# Altium PCB FU-AM-FU6861-B-025-HW-V1.0-20210601.pcbdoc (part 2 of 2)
Units mil, origin at the board's own origin, x right, y up, seen from the top; angles counter-clockwise.
Board outline 6000 x 4000 mil, 2 copper layers (Top Layer, Bottom Layer); 124 components, 51 nets, 325 pads, 278 vias.
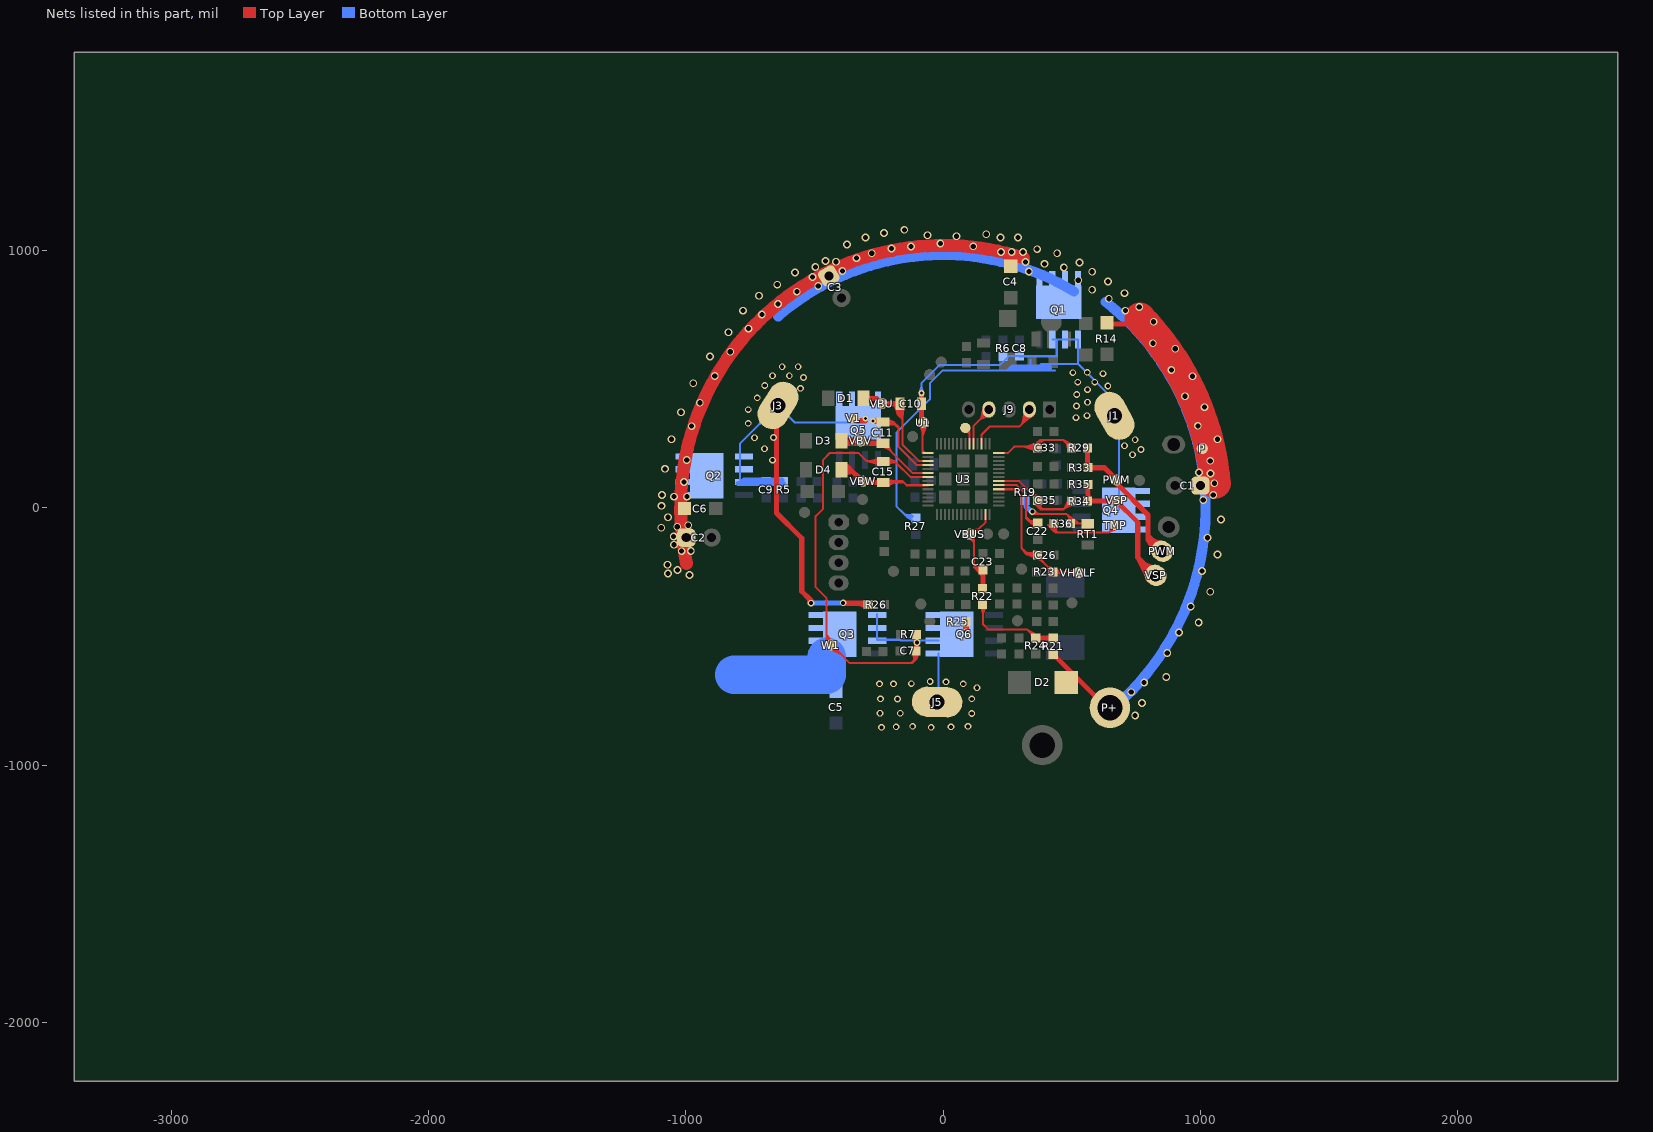
[diagram p2: the nets of this part, all layers, seen from the top]

## Via types
v1: diameter 26, hole 16, Top Layer to Bottom Layer, tented both sides, 137 vias
v2: diameter 30, hole 20, Top Layer to Bottom Layer, tented both sides, 131 vias
v3: diameter 23.62, hole 11.81, Top Layer to Bottom Layer, tented both sides, 7 vias
v4: diameter 27.56, hole 15.75, Top Layer to Bottom Layer, tented both sides, 3 vias

## Nets (pads, with @x,y where several pads share a name; then routed paths per layer and width w, separated by ;. In a path a pad name is that pad's centre, name@x,y a point inside that pad or via, vN(x,y) a via of type N, cw(c..) or ccw(c..) an arc to the next point about the centre after c; other vN are vias at no path point) (continued)
NetJ8_1: PWM.1 R29.1 R33.2 | length 804
  Top Layer w20: R33.2@561.05,158.04 R29.1@561.05,233.29 ; R33.2@562.56,156.53 626.75,156.53 PWM.1@674.22,109.06 674.22,94.78 796,-27 796,-109 ; PWM.1@840.09,-192.3 796,-124 ; PWM.1@849,-139 814,-127 796,-109 ; PWM.1@874.34,-188.09 860.09,-188.09 PWM.1@817,-145 ; PWM.1@880,-162 PWM.1@817,-145 ; 796,-124 PWM.1@817,-145 ; 796,-124 796,-109
NetJ10_1: R34.1 R35.2 VSP.1 | length 940.7
  Top Layer w8: VSP.1@843.79,-279.92 VSP.1@849.48,-285.6
  Top Layer w20: R34.1@561.05,26.32 673.68,26.32 756,-56 756,-192.13 ; R34.1@562.56,27.83 R35.2@562.56,91.77 ; VSP.1@801,-249 801,-277 840.87,-277 756,-192.13 ; VSP.1@802,-281 756,-192.13 ; VSP.1@805.94,-242.06 782.94,-219.06 ; VSP.1@805.94,-232.06 VSP.1@853,-245 ; VSP.1@810.94,-232.06 VSP.1@848.79,-269.92 ; VSP.1@822,-236 782.94,-219.06 ; 756,-192.13 782.94,-219.06
NetR19_2: R19.2 R36.1 RT1.1 | length 387.5
  Top Layer w8: v1@346,-22 361,-23 ; v1(346.42,-14.42) 355,-23 361,-23 ; v1@353,-9 363,-19 374,-23 ; R36.1@490,-50 488.5,-33.5 ; 521,-55 478,-23 ; RT1.1@547,-61 516,-61 488.5,-33.5 ; 361,-23 374,-23 ; 374,-23 478,-23 ; 478,-23 488.5,-33.5
  Bottom Layer w20: R19.2@322.34,35.9 322.34,5.66 v1@341,-13
NetR21_2: R21.2 R22.1 R24.1 | length 540.5
  Top Layer w8: R22.1@147,-382 153.99,-411 ; R22.1@153.99,-374.54 153.99,-402 ; R22.1@161,-382 153.99,-402 ; R22.1@166,-381 153.99,-411 ; R24.1@349,-514 338.78,-479.88 ; R24.1@359.69,-505.9 358.9,-505.9 325,-472 ; R24.1@367,-496 338.78,-479.88 ; R21.2@427.2,-505.9 R21.2@427.93,-505.9 ; 153.99,-411 153.99,-450.99 175,-472 325,-472 ; 153.99,-411 153.99,-402 ; 325,-472 338.78,-479.88
  Top Layer w20: R24.1@359.69,-505.17 R21.2@427.2,-505.17
NSS: J9.2 U3.45 | length 429.4
  Top Layer w8: U3.45@148.87,249.8 148.87,284.87 180,316 295,316 306.5,327.5 ; 308,331 J9.2@316,372 ; J9.2@320,370 312,333 ; J9.2@329,366 316.5,337.5 ; J9.2@346.77,367.77 316.5,337.5 ; J9.2@347,359 306.5,327.5 ; 306.5,327.5 312,333 ; 312,333 316.5,337.5
OVP: C23.1 R22.2 U3.27 VBUS.1 | length 554.3
  Top Layer w8: VBUS.1@104,-118 120,-136 ; VBUS.1@105,-87 138.31,-81.31 ; VBUS.1@108,-93 131.81,-87.81 ; VBUS.1@109,-116 120,-132 ; C23.1@141,-245 123,-227 120,-227 ; C23.1@142,-229 130.59,-229.57 ; C23.1@148,-242 130.59,-229.57 ; 151,-265 120,-231 ; C23.1@154.48,-240.95 129.95,-240.95 120,-231 ; U3.27@164.61,-25.79 164.61,-55 138.31,-81.31 ; 120,-231 120,-227 ; 120,-227 120,-222 ; 120,-222 120,-136 ; 120,-222 130.59,-229.57 ; 120,-136 120,-132 ; 120,-132 120,-99.61 131.81,-87.81 ; 131.81,-87.81 138.31,-81.31
  Top Layer w20: R22.2@154.48,-311.06 C23.1@154.48,-240.95
P: C1.1 C2.1 C3.1 C4.2 C5.2 C6.2 D2.1 P+.1 P.1 Q1.5 Q1.6 Q1.7 Q1.8 Q2.5 Q2.6 Q2.7 Q2.8 Q3.5 Q3.6 Q3.7 Q3.8 R14.1 R21.1 | length 6635.7
  Top Layer w20: R21.1@427.93,-568.89 P+.1@635.93,-776.89 ; R14.1@640.29,715.72 712.28,715.72
  Top Layer w50: -997.82,-215.37 cw(c0,0) 312.77,971.7
  Top Layer w120: 764.32,737.86 cw(c0,0) v2@1058.04,95.77
  Bottom Layer w40: -641.56,745.34 cw(c0,0) Q1.5@508.43,841.8 ; 631.63,801.01 cw(c0,0) P+.1@703.41,-738.77
  Bottom Layer w150: -813.14,-648.65 -453,-648.65 Q3.5@-453,-578
  other v2: 746,-807 773,-758 731,-716 781,-679 867,-657 871,-564 917,-484 993,-445 962,-383 1038,-326 -986,-261 -1070,-255 1006,-245 -1033,-241 -1072,-221 1066,-181 -1017,-168 -981,-167 -1047,-143 1027,-116 -1048,-111 -1096,-77 -1034,-73 -991,-67 1080,-45 -1070,-36 -1095,8 1011,31 -1047,44 -996,44 -1093,50 1050,50 1054,96 -1008,101 1039,134 994,138 -1082,152 1038,183 -997,186 -1056,267 1066,267 -978,318 990,319 -1019,372 1016,392 -946,409 940,434 -972,485 969,512 -888,513 887,536 -907,589 -828,607 902,619 815,640 -835,683 -757,697 818,724 -705,752 -778,767 708,767 762,781 -642,793 644,813 -716,825 705,835 -569,841 579,848 -486,863 -645,868 641,880 525,885 -508,898 -576,915 579,918 333,919 -392,921 469,935 -497,937 394,949 530,954 320,956 -417,957 -458,960 -337,971 -278,990 443,990 225,995 266,995 310,995 365,1006 -201,1009 -125,1016 117,1017 -374,1024 -11,1028 -302,1051 223,1051 291,1051 52,1056 -61,1060 167,1064 -230,1069 -151,1081
P07: pad.0@86,311 U3.48 | length 77.8
  Top Layer w8: pad.0@86,297 102,290 ; pad.0@100,310 102,290 ; U3.48@101.62,249.8 102,290
PWM: C33.2 R29.2 U3.42 | length 591.5
  Top Layer w8: U3.42@215.8,214.36 252.36,214.36 276,238 277,238 277.08,238.08 312,238.08 ; 325,238.08 C33.2@368.04,238.08 ; 345,242 378,264 ; 347.54,233.54 378,264 ; C33.2@350,232 323,238.08 ; C33.2@353,226 312,238.08 ; C33.2@353,249 323,238.08 ; C33.2@365,245 382.75,257.97 ; C33.2@377,242 382.75,257.97 ; R29.2@485,228 479.17,252.17 ; R29.2@498.05,233.29 479.17,252.17 ; R29.2@503,247 467.34,264 ; 312,238.08 323,238.08 ; 378,264 391,264 ; 382.75,257.97 391,264 ; 391,264 467.34,264 ; 467.34,264 479.17,252.17
SCLK: J9.4 U3.47 | length 265.9
  Top Layer w8: U3.47@117.37,249.8 117.37,317.37 146.5,346.5 ; J9.4@155,382 146.5,346.5 ; J9.4@160,373 146.5,346.5 ; J9.4@175,357 146.5,346.5 ; J9.4@189.29,389.29 146.5,346.5
TMP: C22.2 R36.2 TMP.1 U3.34 | length 786.4
  Top Layer w8: U3.34@215.8,88.38 286.62,88.38 322,53 322,-8 322,-35 ; 338,-50 322,-35 ; C22.2@353,-68 322,-40 ; C22.2@357,-54 336.58,-50.4 ; C22.2@357,-49 336.58,-50.4 ; C22.2@366,-60 342,-60 331.5,-49.5 ; 408,-67 430.75,-89.75 ; R36.2@426,-75 437.77,-86.24 ; R36.2@430.75,-61.03 430.75,-89.75 ; R36.2@440,-73 437.77,-86.24 ; TMP.1@655,-66 650,-88 ; TMP.1@669,-69 650,-88 ; TMP.1@670,-83 642,-96 ; 322,-40 331.5,-49.5 ; 322,-40 322,-35 ; 331.5,-49.5 336.58,-50.4 ; 430.75,-89.75 437,-96 448,-96 ; 437.77,-86.24 448,-96 ; 448,-96 642,-96 ; 642,-96 650,-88
U: C8.1 C10.1 J1.1 Q1.1 Q1.2 Q1.3 Q4.5 Q4.6 Q4.7 Q4.8 R6.1 R27.1 U1.1 U3.1 | length 3766.5
  Top Layer w8: U1.1@-91,324 -80.37,296 ; U3.1@-80.37,215.1 U3.1@-79.63,214.36 ; U1.1@-80.37,333.63 -80.37,296 ; U3.1@-80,216 -80.37,222 ; U1.1@-73,317 -80.37,291 ; U1.1@-64,320 -80.37,279 ; U3.1@-59.8,214.36 -72.73,214.36 -80.37,222 ; -80.37,222 -80.37,279 ; -80.37,279 -80.37,291 ; -80.37,291 -80.37,296
  Top Layer w20: U1.1@-85,333.63 v3(-85,446)
  Bottom Layer w8: R27.1@-124,-27 -135,-28 -151.5,-23.5 ; R27.1@-120.62,-37 -138,-37 ; R27.1@-120,-48 -138,-37 ; R27.1@-118,-32 -145,-30 ; v3@-92,448 -85,473 ; v3(-85,446) -85,473 ; v3@-79,449 -85,473 ; C8.1@297.17,590.08 254.89,590.08 219.8,555 -15,555 -85,485 -85,473 ; 339.5,555.5 339.5,575.5 ; 354.5,541.5 254.5,541.5 ; 370.5,547.5 260.5,547.5 ; 375,553 266,553 260.5,547.5 ; 416,551 372,551 ; 418.5,548.5 369.5,548.5 ; 419.5,542.5 363.5,542.5 ; Q1.3@423.99,654.48 Q1.2@473.99,654.48 Q1.1@523.99,654.48 523.99,560.01 665.35,418.65 J1.1@665.35,358.27 ; 435,535 356,535 ; 522.97,559 380,559 377.5,556.5 372,551 ; Q4.5@682.63,-8.55 J1.1@682.63,340.99 ; -151.5,-23.5 -182,7 -182,292 -52,422 -52,485 -2,535 248,535 ; -151.5,-23.5 -145,-30 ; -145,-30 -138,-37 ; 248,535 356,535 ; 248,535 254.5,541.5 ; 254.5,541.5 260.5,547.5 ; 356,535 363.5,542.5 ; 363.5,542.5 369.5,548.5 ; 369.5,548.5 372,551
  Bottom Layer w10: C8.1@297.17,589.33 440.62,589.33 440.62,650.87
  other v1: 736,207 769,227 705,242 746,265 516,351 559,359 518,396 561,411 519,441 561,460 640,474 523,489 589,489 621,522 504,526 560,527
V: C9.1 C11.1 J3.1 Q2.1 Q2.2 Q2.3 Q5.5 Q5.6 Q5.7 Q5.8 R5.1 R26.1 U3.4 V1.1 | length 2589.4
  Top Layer w7.87: -173.98,290 -173.98,237.85 -103.12,166.99 U3.4@-59.81,166.99
  Top Layer w8: J3.1@-642.33,392.55 J3.1@-642.33,398.22 ; V1.1@-347.23,349.01 V1.1@-337.28,349.01 ; C11.1@-234.27,334.23 -193,334.23 ; C11.1@-218,345 -193,334.23 ; C11.1@-214,328 -187.88,329.12 ; C11.1@-213,323 -193,325 -173.98,311 ; -173.98,290 -173.98,311 ; -193,334.23 -187.88,329.12 ; -187.88,329.12 -173.98,315.22 -173.98,311
  Top Layer w20: J3.1@-648,392.55 -648,-20 -550,-118 -550,-324 -522,-352 ; v1@-518,-370 -522,-352 ; v1(-514,-370) -514,-360 -522,-352 ; v1@-385.48,-370.52 -331,-370.52 ; V1.1@-337.28,339.06 v3@-301.94,339.06 ; R26.1@-302,-382 -331,-370.52 ; R26.1@-294.61,-370.52 -331,-370.52 ; v3(-272.61,337.27) C11.1@-234.27,337.27
  Bottom Layer w8: Q2.3@-774.01,108.17 -789.76,108.17 -789.76,158.17 -789.76,250.79 J3.1@-642.33,398.22 -576.07,331.96 Q5.5@-329.58,331.96
  Bottom Layer w20: Q2.3@-798.34,94.34 R5.1@-620.87,94.34 ; Q2.3@-774.01,108.17 R5.1@-627.11,108.17 ; v1(-514,-370) v1@-390,-370
  other v1: -389,-369 -664,186 -695,230 -734,273 -660,274 -758,329 -758,382 -723,428 -555,465 -694,476 -543,507 -664,514 -598,514 -626,549 -564,549
  other v3: -302.94,347.06
VBU: C10.2 D1.2 U3.3 VBU.1 | length 657.1
  Top Layer w7.87: -158.24,293 -158.24,245.72 -95.24,182.73 U3.3@-59.81,182.73
  Top Layer w8: -192,401 -183,387 -176.91,363.91 ; C10.2@-175.36,404.87 -176.91,406.42 -176.91,404.87 -176.91,363.91 ; C10.2@-170,391 -173,360 ; -165,378 -165,352 ; C10.2@-165,390 -168,355 ; C10.2@-162,388 -158.71,350.67 ; -158.24,293 -158.24,345.24 ; C10.2@-155,386 -158.71,350.67 ; -176.91,363.91 -173,360 ; -173,360 -168,355 ; -168,355 -165,352 ; -165,352 -158.24,345.24 ; -158.71,350.67 -158.24,345.24
  Top Layer w20: D1.2@-309.4,426.11 -258.64,426.11 VBU.1@-238.47,405.94 -237.4,404.87 -176.91,404.87 -175.36,404.87 C10.2@-167.48,404.87
VBV: C11.2 D3.2 U3.6 VBV.1 | length 627.7
  Top Layer w7.87: C11.2@-235.45,238.48 -207.44,224.06 C11.2@-221.31,252.62 ; C11.2@-233.04,249.66 -118.87,135.49 U3.6@-59.81,135.49 ; C11.2@-216,247.31 -202.13,218.75
  Top Layer w8: D3.2@-395.59,261.19 VBV.1@-335,264 ; D3.2@-387.71,269.07 VBV.1@-317.89,269.07 ; C11.2@-234.27,249.66 C11.2@-233.04,249.66
  Top Layer w20: D3.2@-385.95,251.55 -289,251.55 ; VBV.1@-315,264 -289,251.55 ; C11.2@-234.27,251.55 -289,251.55
VBW: C15.2 D4.2 U3.9 VBW.1 | length 591.2
  Top Layer w7.87: -121,88.25 U3.9@-59.81,88.25
  Top Layer w8: D4.2@-399.52,152.65 D4.2@-385,152.65 ; C15.2@-238.41,98.47 C15.2@-232.89,98.47 ; C15.2@-232.89,104 -183,104 ; C15.2@-215,93 -183,104 ; C15.2@-214,87 -189,99 -153.62,99.38 ; C15.2@-214,109 -183,104 ; -121,88.25 -142.49,88.25 -153.62,99.38 ; -183,104 -158.24,104 -153.62,99.38
  Top Layer w20: D4.2@-385,152.65 -363.65,152.65 ; D4.2@-383,135 -352,141 ; D4.2@-375,162 -363.65,152.65 ; VBW.1@-317,112 -335.5,124.5 ; VBW.1@-298,105 -279,98.47 ; C15.2@-232.89,98.47 -279,98.47 ; -363.65,152.65 -352,141 ; -352,141 -335.5,124.5 ; -335.5,124.5 -309.47,98.47 -279,98.47
VHALF: C26.1 R23.2 U3.33 VHALF.1 | length 955.9
  Top Layer w8: U3.33@215.8,72.63 278.37,72.63 304,47 304,-155 ; 317,-174 304,-155 ; 324,-180 355,-193 383.88,-206.12 ; 347,-176 326,-174 316,-167 304,-155 ; C26.1@355,-187 322.64,-179.64 ; C26.1@355,-172 332,-178 316,-173 322.64,-179.64 ; C26.1@360.13,-179.64 322.64,-179.64 ; C26.1@363.13,-179.64 363.13,-185.37 383.88,-206.12 ; C26.1@379,-184 386.88,-209.12 ; R23.2@413,-249 405.88,-228.12 ; R23.2@437,-257 473,-248.42 ; R23.2@439,-239 469,-248.42 ; R23.2@439,-235 405.88,-228.12 ; VHALF.1@510,-258 485,-248.42 ; VHALF.1@515,-240 489,-248.42 ; VHALF.1@522.36,-248.42 489,-248.42 ; 383.88,-206.12 386.88,-209.12 ; 386.88,-209.12 405.88,-228.12 ; 405.88,-228.12 R23.2@426.18,-248.42 469,-248.42 ; 469,-248.42 473,-248.42 ; 473,-248.42 485,-248.42 ; 485,-248.42 489,-248.42
VSP: C35.2 R34.2 U3.35 | length 541.7
  Top Layer w8: U3.35@215.8,104.13 295.87,104.13 344,56 ; C35.2@353,17 367.46,5.54 ; C35.2@354,33 347.5,52.5 ; C35.2@364.46,35.54 347.5,52.5 ; C35.2@366,14 378.81,2.94 ; C35.2@367.46,29.43 367.46,5.54 ; C35.2@376,45 344,56 ; C35.2@378,18 378.81,2.94 ; R34.2@486,32 472.87,1.13 ; R34.2@498.05,26.32 472.87,1.13 ; R34.2@505,13 466.74,-5 ; 344,56 347.5,52.5 ; 367.46,5.54 378,-5 388,-5 ; 378.81,2.94 388,-5 ; 388,-5 466.74,-5 ; 466.74,-5 472.87,1.13
W: C7.1 C15.1 J5.1 Q3.1 Q3.2 Q3.3 Q6.5 Q6.6 Q6.7 Q6.8 R7.1 R25.1 U3.7 W1.1 | length 2724.3
  Top Layer w7.87: -126.74,119.74 U3.7@-59.81,119.74
  Top Layer w8: W1.1@-454,-530 -453,-505 ; W1.1@-441,-523 -453,-500 ; W1.1@-436.36,-532.88 -453,-516.25 -453,-505 ; W1.1@-436,-550 -398.5,-567.5 ; W1.1@-436,-543 -406,-560 ; W1.1@-434.74,-531.26 -406,-560 ; W1.1@-432,-520 -453,-492 ; W1.1@-420,-530 -406,-560 ; C15.1@-253,191 -284,181.83 ; C15.1@-250,168 -297.83,181.83 ; C15.1@-244,174 -284,181.83 ; C15.1@-217,178 -198.88,176.21 ; C15.1@-215,192 -188.83,181.83 ; C15.1@-214,169 -198.88,176.21 ; -126.74,119.74 -181.5,174.5 ; C7.1@-115,-570 -113,-590 -125,-603 ; C7.1@-111,-562 -109,-592 ; C7.1@-103.8,-554.42 -103.8,-586.8 ; C7.1@-95,-567 -103.8,-586.8 ; -453,-505 -453,-500 ; -453,-500 -453,-492 ; -453,-492 -453,-351 -496,-308 -496,-32 -467,-3 -467,187 -440,214 -330,214 -297.83,181.83 ; -406,-560 -398.5,-567.5 ; -398.5,-567.5 -363,-603 -125,-603 ; -297.83,181.83 -284,181.83 ; -284,181.83 -188.83,181.83 ; -198.88,176.21 -181.5,174.5 ; -188.83,181.83 -181.5,174.5 ; -125,-603 -120,-603 -109,-592 ; -109,-592 -103.8,-586.8
  Top Layer w20: C7.1@-103.8,-554.42 R7.1@-103.8,-491.71
  Top Layer w25: v1(88.45,-482.45) R25.1@88.45,-442.51
  Bottom Layer w8: Q3.1@-256.87,-412.38 -256.87,-512.37 -166.31,-512.37 ; -166.31,-514.9 Q6.6@-18.9,-514.9 ; J5.1@-17.49,-748.42 Q6.5@-17.49,-566.31
  other v1: -240,-853 -47,-853 -183,-851 30,-851 -119,-849 96,-849 111,-799 -246,-798 -167,-798 -178,-743 -244,-742 111,-742 131,-699 -248,-684 -193,-684 78,-684 -124,-683 11,-676 -51,-675 -101.8,-523
pads on no net: U3.18 U3.20 U3.22 U3.23 U3.25 U3.26 U3.29 U3.39 U3.40 U3.41 U3.44 U3.49 U3.50 U3.53

## Polygon pours and split planes (outlines as drawn)
GND on Top Layer "Bottom Layer-No Net" (hatched Horizontal grid 8 track 10, remove dead copper, pour order 1038): -63,-154 -63,-144 -63,-133 -37,-107 -35,-105 -23,-105 -23,-106 -22,-107 -22,-114 -22,-116 -30,-124 -37,-131 -37,-158
GND on Top Layer "Bottom Layer-No Net 1" (hatched 90Degree grid 8 track 8, remove dead copper, pour order 1044): -12.78,201.44 168.32,201.44 168.32,137.58 171.39,134.51 168.32,137.58 168.32,146.32 180.13,134.51 168.32,122.7 168.32,83.33 168.32,20.34 58.09,20.34 2.97,20.34 -8.84,8.53 -24.59,24.27 -24.59,24.28 -12.78,36.09 -12.78,43.96 -24.59,55.77 -12.78,67.58 -12.78,79.39 -12.78,201.44
P on Top Layer "Bottom Layer-No Net" (hatched Horizontal grid 8 track 10, remove dead copper, pour order 1039): 433,-566 721,-566 831,-456 944,-177 974,-4 974,116 974,326 982,334 1149,167 1149,81 1149,-526 1051,-624 755,-920 669,-920 634,-920 450,-736 438,-724 438,-663 438,-615 423,-600 418,-595 418,-562
P on Top Layer "Bottom Layer-No Net" (hatched Horizontal grid 8 track 10, remove dead copper, pour order 1040): 270,899 467,899 475,891 618,748 618,718 618,714 630,702 631,701 700,701 724,701 731,694 1010,415 1010,190 1070,190 1154,106 1152,108 1152,338 1152,478 994,636 499,1131 -111,1131 -238,1131 -294,1075 -308,1061 -308,1003 170,1003 220,953 235,938 235,905 235,903 239,899 268,899
P on Top Layer "Bottom Layer-No Net" (hatched Horizontal grid 8 track 10, remove dead copper, pour order 1041): -967,-232 -967,49 -965,51 -965,210 -965,262 -966,263 -915,465 -717,735 -726,713 -252,983 -263,1138 -783,957 -1083,496 -1161,-152 -1142,-171 -1142,-212 -1142,-246 -1118,-270 -1111,-277 -1000,-277 -983,-277 -967,-261
GND on Top Layer "Bottom Layer-No Net" (hatched Horizontal grid 8 track 10, remove dead copper, pour order 1042): -897,263 -901,259 -901,229 -901,-60 -909,-68 -925,-84 -925,-122 -925,-266 -953,-294 -980,-321 -980,-440 -980,-659 -696,-943 -508,-1131 191,-1131 433,-1131 529,-1035 557,-1007 557,-959 557,-906 516,-865 377,-726 377,-556 342,-556 342,-609 336,-615 332,-619 275,-619 213,-619 201,-631 199,-633 199,-675 199,-910 176,-933 164,-945 101,-945 -278,-945 -291,-932 -320,-903 -320,-856 -320,-684 -327,-677 -336,-668 -379,-668 -480,-668 -518,-630 -603,-545 -603,-259 -603,-131 -689,-45 -714,-20 -714,107 -714,131 -797,214 -824,241 -824,385
GND on Top Layer "Bottom Layer-No Net" (hatched Horizontal grid 8 track 10, remove dead copper, pour order 1043): -662,608 -659,611 -576,611 -538,611 -496,569 -474,547 -382,547 -114,547 -95,566 -80,581 -80,615 -80,646 -110,676 -156,722 -156,797 -156,850 -76,930 -61,945 -61,947 -171,947 -219,899 -229,909 -303,909 -320,909 -334,895 -403,826 -426,826 -434,826 -468,792 -529,731 -568,731
GND on Top Layer "Bottom Layer-No Net" (hatched Horizontal grid 8 track 10, remove dead copper, pour order 1045): 38,294 36,294 35,295 30,300 30,522 30,607 78,655 153,730 153,799 153,853 87,919 51,955 26,955 165,955 171,949 199,921 199,911 199,864 209,854 214,849 293,849 470,849 513,806 584,735 584,709 584,690 593,681 600,674 636,674 705,674 716,663 773,585 804,521 687,530 683,534 683,594 683,633 674,642 668,648 648,648 552,648 541,659 527,673 527,695 527,706 517,716 513,720 494,720 467,720 456,709 447,700 418,700 396,700 386,710 380,716 354,716 334,716 323,705 297,679 261,679 240,679 206,645 185,624 150,624 130,624 121,615 119,613 97,613 62,613 52,603 37,588 37,473 37,297 38,296
U on Top Layer "Bottom Layer-No Net" (hatched Horizontal grid 8 track 10, remove dead copper, pour order 1046): 481,351 482,352 482,473 482,530 487,535 491,539 511,539 622,539 627,534 687,430 757,306 789,201 780,192 759,192 729,192 644,277 588,333 511,333 496,333 481,348
W on Top Layer "Bottom Layer-No Net" (hatched Horizontal grid 8 track 10, remove dead copper, pour order 1047): -267,-659 -266,-658 -93,-658 155,-658 164,-667 169,-672 169,-690 169,-885 158,-896 150,-904 123,-904 -251,-904 -268,-887 -281,-874 -281,-814 -281,-672 -267,-658
V on Top Layer "Bottom Layer-No Net" (hatched Horizontal grid 8 track 10, remove dead copper, pour order 1048): -656,146 -778,268 -778,345 -778,379 -777,380 -705,493 -642,574 -616,574 -551,574 -527,550 -513,536 -513,528 -513,525 -512,524 -565,422 -630,307 -641,244 -645,119
+12V on Top Layer "Bottom Layer-No Net" (hatched Horizontal grid 8 track 10, remove dead copper, pour order 1049): 93,575 202,575 216,589 223,596 284,596 286,596 322,632 349,659 349,676 368,676 369,677 370,676 370,668 370,521 355,506 350,501 210,501 145,501 128,484 123,479 99,479 74,479 73,480 73,495 73,499 79,505 86,512 109,512 86,512 94,520 201,520 277,520 279,518 280,519 280,530 280,545 279,544 269,544 76,544 75,545
NetC17_1 on Top Layer "Bottom Layer-No Net" (hatched Horizontal grid 8 track 10, remove dead copper, pour order 1050): 469,677 469,629 481,617 523,575 571,575 655,575 657,573 657,617 568,617 545,617 523,639 488,674 485,674
V on Top Layer "Bottom Layer-No Net" (hatched Horizontal grid 8 track 10, remove dead copper, pour order 1051): -346,362 -224,362 -184,322 -186,324 -263,324 -278,324 -286,332 -287,333 -334,333 -346,333 -350,337
VBU on Top Layer "Bottom Layer-No Net" (hatched Horizontal grid 8 track 10, remove dead copper, pour order 1052): -305,445 -280,445 -232,445 -217,430 -210,423 -170,423 -170,378 -172,376 -188,392 -210,392 -249,392 -260,403 -265,408 -295,408 -311,408
GND on Top Layer "Bottom Layer-No Net" (hatched Horizontal grid 8 track 10, remove dead copper, pour order 1053): -421,-268 -420,-269 -306,-269 -246,-269 -237,-278 -229,-286 -181,-286 -79,-286 -66,-273 -62,-269 -62,-186 -62,-144 -50,-132 -48,-130 -41,-130 -36,-130 -35,-131 -34,-132 -34,-155 -34,-317 -38,-321 -48,-331 -343,-331 -414,-331 -429,-316 -442,-303 -442,-274
GND on Top Layer "Bottom Layer-No Net" (hatched Horizontal grid 8 track 10, remove dead copper, pour order 1054): 101,-381 101,-245 98,-242 97,-241 97,-170 97,-147 83,-133 70,-133 67,-133 65,-135 65,-144 65,-149 69,-153 73,-157 73,-172 73,-383 74,-384 75,-383 101,-383
GND on Top Layer "Bottom Layer-No Net" (hatched Horizontal grid 8 track 10, remove dead copper, pour order 1055): 334,-100 614,-100 619,-105 620,-106 620,-114 620,-194 618,-196 610,-204 471,-204 417,-204 414,-201 414,-186 414,-156 408,-150 402,-144 389,-144 338,-144 336,-142 329,-135 329,-116 329,-104 332,-101
GND on Top Layer "Bottom Layer-No Net" (hatched Horizontal grid 8 track 10, remove dead copper, pour order 1056): 289,216 313,216 330,200 407,200 414,207 414,242 419,247 456,247 457,246 457,194 467,184 511,184 513,186 513,81 509,77 460,77 453,70 453,25 446,18 421,18 419,20 419,109 405,123 400,123 414,137 414,188 406,196 289,196 285,200 285,208
GND on Top Layer "Bottom Layer-No Net" (hatched Horizontal grid 8 track 10, remove dead copper, pour order 1057): 400,693 400,507 388,495 368,475 283,475 154,475 144,465 135,456 112,456 93,456 88,451 77,440 77,392 77,344 80,341 81,340 89,340 107,340 114,347 125,358 125,381 125,413 132,420 144,432 190,432 439,432 443,436 451,444 451,470 451,540 463,552 472,561 472,578 472,584 463,593 440,616 440,704
GND on Top Layer "Bottom Layer-No Net" (hatched Horizontal grid 8 track 10, remove dead copper, pour order 1058): -257,-118 -257,-39 -231,-13 -227,-9 -185,-9 -123,-9 -90,24 -90,23 -108,5 -107,4 -107,0 -107,-10 -135,-38 -217,-120 -251,-120
GND on Top Layer "Bottom Layer-No Net" (hatched Horizontal grid 8 track 10, remove dead copper, pour order 1059): 826,236 826,69 832,63 880,15 897,15 911,15 922,26 935,39 935,119 935,240 901,335
I_SHUNT on Bottom Layer "Bottom Layer-No Net" (hatched Horizontal grid 8 track 10, remove dead copper, pour order 1060): -361,220 -252,220 -214,220 -210,216 -206,212 -206,193 -206,-6 -176,-36 -147,-65 -147,-118 -147,-136 -133,-150 -108,-175 268,-175 343,-175 360,-158 375,-143 375,-30 375,42 469,42 478,33 489,22 513,22 566,22 567,21 567,13 567,-104 582,-119 605,-142 605,-280 605,-330 585,-350 569,-366 543,-366 529,-366 520,-375 516,-379 512,-379 504,-379 495,-370 491,-366 469,-366 379,-366 373,-372 334,-411 334,-450 334,-510 325,-519 321,-523 215,-523 168,-523 168,-387 163,-382 151,-370 125,-370 -318,-370 -339,-349 -340,-348 -340,-276 -340,-13 -355,2 -364,11 -364,46 -364,218 -362,220
GND on Bottom Layer "Bottom Layer-No Net" (hatched Horizontal grid 8 track 10, remove dead copper, pour order 1061): 486,-470 485,-471 434,-471 372,-471 369,-474 367,-476 367,-485 367,-523 356,-534 277,-613 248,-613 238,-613 235,-616 215,-636 215,-649 215,-1053 222,-1060 229,-1067 269,-1067 456,-1067 521,-1002 540,-983 540,-850 540,-691 568,-663 586,-645 586,-506 586,-483 578,-475 573,-470 496,-470
V on Bottom Layer "Bottom Layer-No Net" (hatched Horizontal grid 8 track 10, remove dead copper, pour order 1062): -253,271 -239,271 -222,271 -219,274 -218,275 -218,297 -218,569 -225,576 -236,587 -262,587 -655,587 -664,578 -798,360 -803,355 -803,209 -803,104 -804,103 -803,102 -790,102 -722,102 -715,95 -708,88 -662,88 -609,88 -608,89 -608,109 -621,122 -639,140 -639,167 -639,171 -626,184 -625,185 -602,185 -451,185 -441,195 -440,196 -440,209 -440,255 -434,261 -424,271 -391,271
W on Bottom Layer "Bottom Layer-No Net" (hatched Horizontal grid 8 track 10, remove dead copper, pour order 1063): -294,-400 113,-400 116,-403 118,-405 118,-413 118,-594 146,-622 166,-642 166,-687 166,-895 167,-896 157,-906 118,-906 -269,-906 -282,-893 -296,-879 -296,-666 -296,-628 -294,-626 -284,-616 -263,-616 -188,-616 -181,-609 -169,-597 -169,-574 -169,-545 -175,-539 -190,-524 -228,-524 -288,-524 -294,-518 -294,-408
GND on Bottom Layer "Bottom Layer-No Net" (hatched Horizontal grid 8 track 10, remove dead copper, pour order 1064): -403,-801 -640,-801 -650,-811 -670,-831 -670,-854 -670,-908 -630,-948 -442,-1136 188,-1136 264,-1136 366,-1034 337,-1005 337,-945 278,-945 236,-903 185,-954 43,-954 -287,-954 -312,-929 -339,-902 -339,-836 -339,-817 -355,-801
P on Bottom Layer "Bottom Layer-No Net" (hatched Horizontal grid 8 track 10, remove dead copper, pour order 1065): -967,-100 -967,-136 -967,-153 -949,-171 -710,-410 -392,-410 -344,-410 -343,-411 -343,-416 -343,-736 -346,-739 -351,-744 -386,-744 -851,-744 -895,-700 -1123,-472 -1123,-194 -1123,363 -1042,444 -1035,437 -880,437 -880,441 -888,449 -857,418 -857,191 -857,-17 -864,-24 -871,-31 -886,-31 -934,-31 -943,-40 -968,-65 -968,-99
GND on Bottom Layer "Bottom Layer-No Net" (hatched Horizontal grid 8 track 10, remove dead copper, pour order 1066): 582,-477 731,-477 783,-425 783,-402 866,-287 924,-76 923,-45 896,-18 853,-18 843,-8 843,313 844,314 654,668 680,682 772,577 872,385 944,222 937,186 937,39 959,17 970,-11 962,-116 939,-243 860,-432 770,-580 708,-627 688,-647 563,-647
P on Bottom Layer "Bottom Layer-No Net" (hatched Horizontal grid 8 track 10, remove dead copper, pour order 1067): 733,-684 600,-684 586,-698 578,-706 578,-780 578,-934 583,-939 587,-943 613,-943 712,-943 756,-899 768,-887 768,-688
P on Bottom Layer "Bottom Layer-No Net" (hatched Horizontal grid 8 track 10, remove dead copper, pour order 1068): 970,244.52 970,59.99 991,37.2 1000,27.43 1000,22 1000,274.91 999,276
P on Bottom Layer "Bottom Layer-No Net" (hatched Horizontal grid 8 track 10, remove dead copper, pour order 1069): -860,335 -654,664 -654,703 -654,717 -629,742 -528,843 -525,843 -295,940 -2,982 291,935 351,875 351,766 351,749 357,743 359,741 376,741 677,741 703,767 763,827 763,851 749,851 687,913 465,1135 -32,1135 -485,1135 -710,910 -1040,580 -1040,372 -1040,335 -1033,328
P on Bottom Layer "Bottom Layer-No Net" (hatched Horizontal grid 8 track 10, remove dead copper, pour order 1070): 731,-827 793,-827 833,-827 986,-674 1159,-501 1159,-196 1159,557 914,802 855,861 707,861 699,861 680,842 680,758 680,755 718,717 824,611 929,426 1003,173 1025,-100 960,-361 829,-599 680,-747
GND on Bottom Layer "Bottom Layer-No Net" (hatched Horizontal grid 8 track 10, remove dead copper, pour order 1071): 285,892 287,890 287,889 294,889 305,878 310,873 310,852 310,708 308,706 302,700 255,700 139,700 128,689 110,671 110,656 110,623 102,615 100,613 81,613 -39,613 -79,573 -91,561 -146,561 -163,561 -186,584 -220,618 -280,618 -604,618 -615,629 -618,632 -618,704 -443,815 -117,914 88,923
GND on Bottom Layer "Bottom Layer-No Net" (hatched Horizontal grid 8 track 10, remove dead copper, pour order 1072): -911,-75 -910,-74 -873,-74 -835,-74 -805,-44 -784,-23 -628,-23 -477,-23 -470,-30 -465,-35 -465,-57 -465,-257 -460,-262 -456,-266 -404,-266 -370,-266 -366,-270 -366,-284 -366,-332 -370,-336 -371,-337 -396,-337 -725,-337 -857,-205 -929,-133 -929,-91
+12V on Bottom Layer "Bottom Layer-No Net" (hatched Horizontal grid 8 track 10, remove dead copper, pour order 1073): -160,69 -144,94 -143,95 -143,133 -143,289 66,498 69,501 86,501 116,501 117,500 123,494 123,482 124,481 119,476 102,476 76,476 66,466 -96,304 -96,98 -109,98 -113,94 -150,57 -157,57
NetC13_2 on Bottom Layer "Bottom Layer-No Net" (hatched Horizontal grid 8 track 10, remove dead copper, pour order 1074): -491,91 -490,92 -464,92 -441,92 -435,86 -431,82 -431,47 -431,29 -430,28 -429,27 -401,27 -400,28 -400,123 -400,179 -401,180 -410,171 -410,148 -410,132 -423,119 -431,111 -494,111
GND on Bottom Layer "Bottom Layer-No Net" (hatched Horizontal grid 8 track 10, remove dead copper, pour order 1075): -58,-141 -58,-36 -55,-33 -53,-31 -29,-31 -8,-31 37,14 156,133 167,133 262,133 266,129 277,118 277,93 277,-16 306,-45 346,-85 346,-109 346,-129 336,-139 323,-152 190,-152 -47,-152 -58,-141
GND on Bottom Layer "Bottom Layer-No Net" (hatched Horizontal grid 8 track 10, remove dead copper, pour order 1076): -56,35 -58,37 -58,234 -58,298 36,392 94,450 117,450 126,450 143,467 151,475 151,487 151,489 154,492 158,496 178,496 397,496 417,476 440,453 440,447 440,438 439,437 435,433 418,433 148,433 135,420 130,415 130,387 130,342 141,331 146,326 183,326 358,326 361,323 365,319 365,291 365,222 361,218 354,211 329,211 309,211 298,200 290,192 231,192 128,192 88,152 -33,31 -54,31
U on Bottom Layer "Bottom Layer-No Net" (hatched Horizontal grid 8 track 10, remove dead copper, pour order 1077): 418,685 610,685 612,683 812,309 812,-110 786,-140 651,-140 619,-108 619,94 596,117 529,117 499,147 499,467 407,559 400,559 402,561 402,577 401,578 256,578 234,556 208,556 220,568 220,601 407,601 418,612

## Keep-outs
Keep-Out Layer:
  circle w3.94: c-1.53,786.85 r49.21
  circle w3.94: c681.91,-393.7 r49.21
  circle w3.94: c-681.91,-393.7 r49.21
  lines w3.94: -1022.39,-490.26 cw(c0,0) -47.24,1132.87 -47.24,1093.47 cw(c0,0) 47.25,1093.47 47.24,1132.87 cw(c0,0) 1004.72,-525.52 970.59,-505.82 cw(c0,0) 923.35,-587.65 957.48,-607.35 cw(c0,0) -935.77,-640.28 -901.57,-620.54 cw(c0,0) -988.19,-470.52 -1022.39,-490.26

## Other copper
Top Layer:
  rectangle net TMP: 372,-71 425,-49
  rectangle net I_SHUNT: 230,-521 287,-490
  rectangle net W: -121,-546 -88,-490
  rectangle net NetC14_2: 237,-582 285,-554
  rectangle net NetR19_2: 500,-74 552,-51
Bottom Layer:
  rectangle net U: 333,551 412,577
  rectangle net GND: 684,-652 716,-634

## Silkscreen, mask and mechanical layers (free items; w line width, h text height)
Top Overlay:
  circle w5.91: c-0.36,787.01 r137.8
  circle w5.91: c681.53,-394.49 r137.8
  circle w5.91: c-682.61,-395.75 r137.8
  lines w5: -178,-697 -22,-541 -22,-496 ; -447,-945 -178,-945 -179,-944 -179,-676 -447,-676 -447,-945 ; -17,-492 154,-492 154,-411 328,-411 327,-410 327,-273 271,-273 270,-272 270,-137 268,-135 -16,-135 -16,-293 -17,-293 -17,-492
  text "FU6861Q-XCQ-DEMO V1.0" at -797.11,606.31 h45
  text "20210607" at -512.98,521.77 h45
  text "MOSI" at 211,481 h30
  text "NSS" at 318,478 h30
  text "5V" at 410,478 h30
  text "V" at -813.46,459.58 h59.06
  text "GND" at 13,444 h30
  text "U" at 795.71,412.84 h59.06
  text "P07" at -14,299 h30
  text "SCLK" at 124,297 h30
  text "GND" at 790,287 h30
  text "5V" at -552,-85 h30
  text "FIK" at -549,-152 h30
  text "FID" at -547,-234 h30
  text "GND" at -553,-309 h30
  text "W" at -40.59,-976.65 h59.06
Bottom Overlay:
  circle w3.94: c-682.61,-395.75 r98.43
  circle w3.94: c681.53,-394.49 r98.43
  circle w3.94: c-0.36,787.01 r98.43
  lines w3.94: -846.04,293.24 -645.32,168.71 -437.76,503.25 -638.49,627.79 -846.04,293.24 ; -224.54,-866.66 -217.05,-630.56 176.45,-643.04 168.97,-879.14 -224.54,-866.66 ; 468.56,474.51 676.77,586.08 862.72,239.05 654.51,127.49 468.56,474.51
  text "V" at -813.46,459.58 h59.06
  text "U" at 795.71,412.84 h59.06
  text "W" at -40.59,-976.65 h59.06
Top Solder:
  lines w60: -1053.68,-175.4 cw(c0,0) -258.15,1036.52 ; -258,1036 266,1036 ; 272.64,1035.8 cw(c0,3) 1055.33,-162.21 ; 672,-780 1056,-164
Bottom Solder:
  lines w60: -1011,-296 -784,-621 -457,-621 ; -1007.22,287.9 cw(c0,0) -609.96,851.66 ; -270,1020 306,1020 ; -256,129 -256,-223 -216,-263 482,-263 ; 275,-454 275,-285 ; 315,1021.32 cw(c0,0) 1041.49,240.04 ; 427,-925 427,-599 ; 459,-248 459,-30 ; 678.55,-791.81 ccw(c0,0) 1039.59,-81.48